# Altium PCB 2LED-ALUMBoard.PcbDoc
Units mil, origin at the board's own origin, x right, y up, seen from the top; angles counter-clockwise.
Board outline 1381.89 x 1960.63 mil, 2 copper layers (Top Layer, Bottom Layer); 6 components, 20 nets, 37 pads, 0 vias.
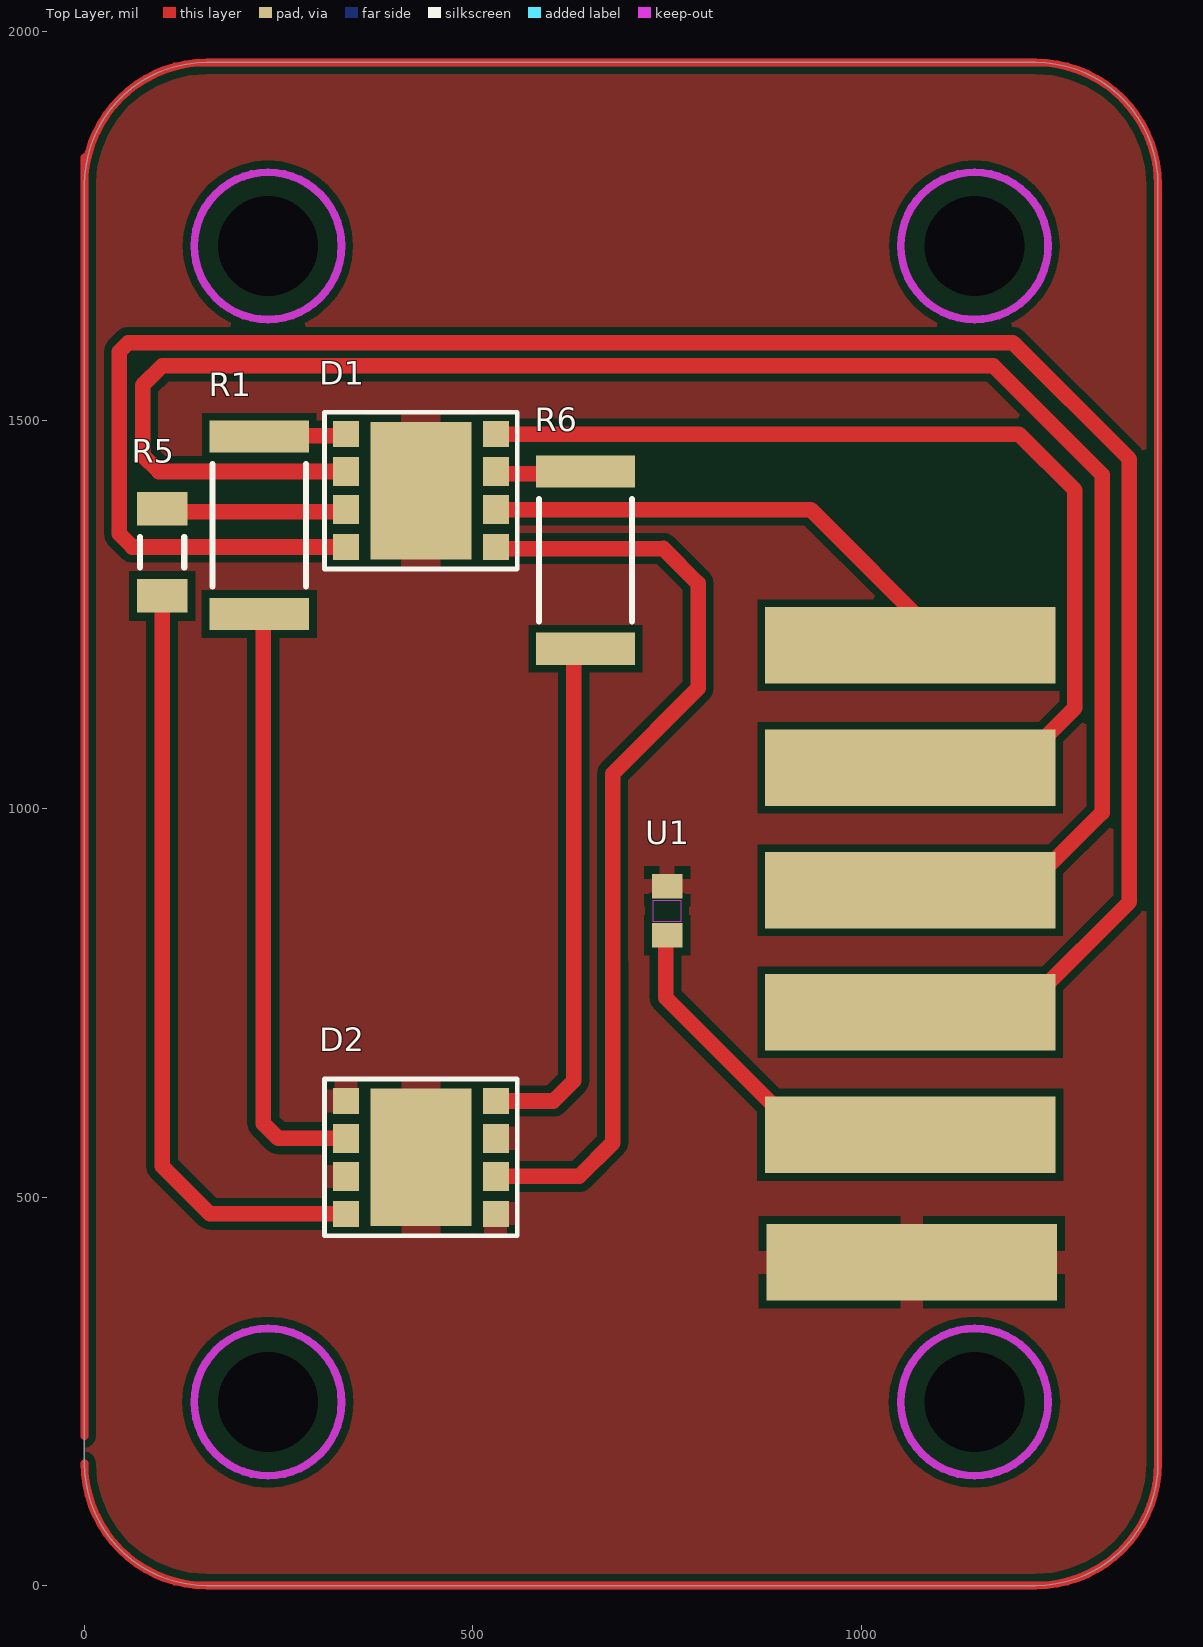
[diagram p0: Top Layer view]
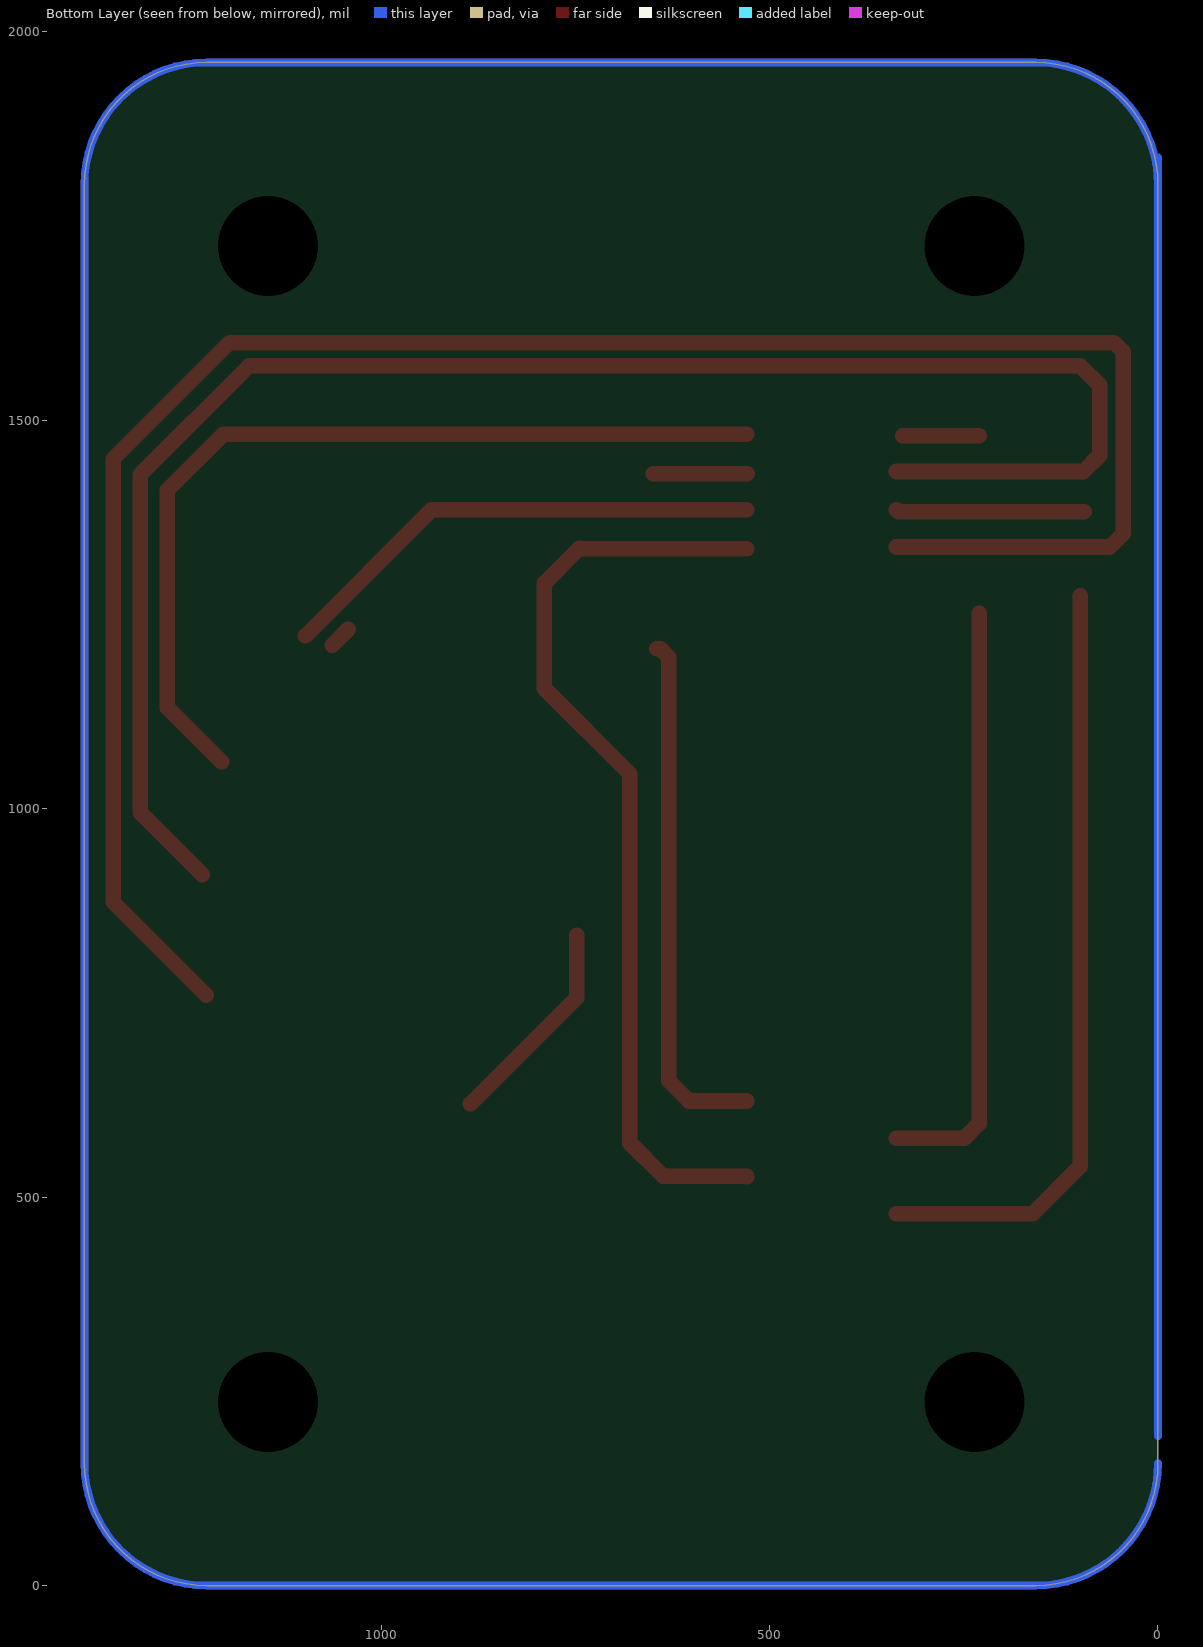
[diagram p1: Bottom Layer view, seen from below]
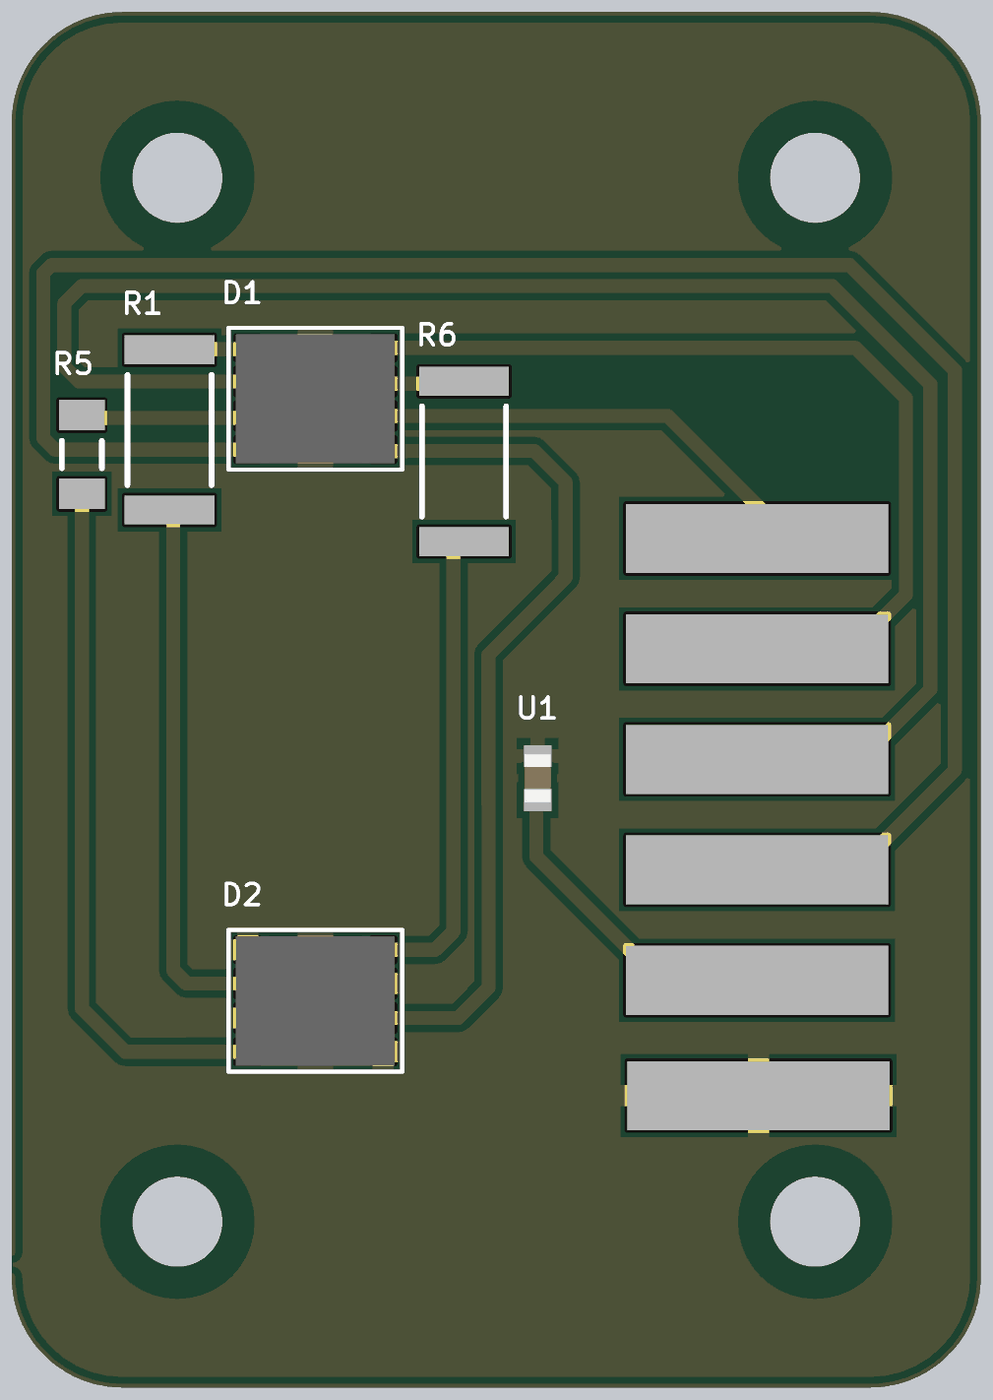
[diagram p2: 3D render of the assembled board from above, using the file's embedded part models]

## Layer stack, top to bottom
Top Solder: solder mask 0.4, Solder Resist, Dk 3.5
Top Layer: signal copper 1.4
Dielectric 1: dielectric 12.6, FR-4, Dk 4.8
Bottom Layer: signal copper 1.4
Bottom Solder: solder mask 0.4, Solder Resist, Dk 3.5

## Board outline
0,157.48 0,1803.15 cw(c157.48,1803.15) 157.48,1960.63 1224.41,1960.63 cw(c1224.41,1803.15) 1381.89,1803.15 1381.89,157.48 cw(c1224.41,157.48) 1224.41,0 157.48,0 cw(c157.48,157.48)

## Design rules (kind name [scope] priority, off if disabled: settings)
Clearance [All] p1: gap=10 ignorepadtopadclearanceinfootprint=FALSE
PolygonConnect [All] p1: connectstyle=Relief reliefconductorwidth=10 reliefentries=4 polygonreliefangle="90 Angle" airgapwidth=10
RoomDefinition LED_aluminum [InComponentClass('LED_aluminum')] p1: confinementstyle=ConfineIn formatcopy=TRUE lockcomponents=FALSE outline 1500,0 3315,0 3315,360 1500,360
RoutingVias [All] p1: holewidth=28 width=50 viastyle="Through Hole" minholewidth=28 minwidth=50 maxholewidth=28 maxwidth=50
SolderMaskExpansion [All] p1: expansion=4 istentingtop=FALSE
SupplyNets "Schematic Supply Nets" [InNet('GND')] p1: voltage=0.000
Width [All] p1: maxlimit=10 minlimit=10 preferedwidth=10
30 further rules are at their usual default settings.

## Components (designator, comment, footprint, x,y, rotation, side; value= is the part's Value field where it differs from the comment)
D1 "LE_RTDUW_S2WM" LE_RTDUW_S2WM 433.07,1409.45 r270 top
D2 "LE_RTDUW_S2WM" LE_RTDUW_S2WM 433.07,551.18 r270 top
R1 "Jumper 2512(6432)" RESC2512(6432)_L#1 225,1365 r90 top value="0.00 Ohm"
R5 "ERJ-8GEY0R00V" RESC3216X70X50NL05T20 100,1330 r90 top
R6 "Jumper 2512(6432)" RESC2512(6432)_L#2 645,1320 r270 top value="0.00 Ohm"
U1 "NTCS0603E3223FMT" NTCS0603_VIS 750,868.5 r90 top

## Footprints (in the part's own frame and the unit in brackets; to place one, negate y for a bottom-side part, rotate by r counter-clockwise, add the part's x,y. Pads: shape width x height; smd on the part's side, far side on the other; paste and mask are expansions set on the pad)
LE_RTDUW_S2WM [mil]
  rect 33.5x33.5 smd: 1(72.6,96.5) 4(-72.6,96.5) 5(-72.6,-96.5) 8(72.6,-96.5)
  rect 37.4x33.5 smd: 2(24.6,96.5) 3(-24.6,96.5) 6(-24.6,-96.5) 7(24.6,-96.5)
  rect 177.17x129.92 smd: 9(0,0)
  silkscreen extent -101,-124 101,124, body extent -92,-113 92,113, height 52
NTCS0603_VIS [mm]
  rect 0.8x1 smd paste+0 mask+0: 1(-0.8,0) 2(0.8,0)
  Top Layer keep-out region: -0.349,-0.449 -0.349,0.449 0.349,0.449 0.349,-0.449
  body extent -0.88,-0.47 0.88,0.47, height 0.94
RESC2512(6432)_L#1 [mm] "Chip Resistor, Body 6.4x3.2mm, IPC High Density"
  rect 1.05x3.25 smd: 2(-2.9,0) 2(2.9,0)
  silkscreen extent -2,-1.52 2,1.53, body extent -3.25,-1.7 3.25,1.7, height 0.75
RESC2512(6432)_L#2 [mm] "Chip Resistor, Body 6.4x3.2mm, IPC High Density"
  rect 1.05x3.25 smd: 1(-2.9,0) 2(2.9,0)
  silkscreen extent -2,-1.52 2,1.53, body extent -3.25,-1.7 3.25,1.7, height 0.75
RESC3216X70X50NL05T20 [mm] "Chip Resistor, 2-Leads, Body 3.20x1.60mm, IPC Medium Density"
  rect 1.1x1.65 smd: 1(-1.425,0) 2(1.425,0)
  silkscreen extent -0.5,-0.72 0.5,0.72, body extent -1.63,-0.82 1.62,0.82, height 0.7

## Part data
D1 D2: "LED OSTAR RGBW 625/527/453NM SMD", Supplier Part Number 1=720-LERTDUWS2WMA2120, Supplier 1=Mouser
R1 R6: library part CMP-1018-00001-1, "Jumper 2512 (6432 Metric)", Case-EIA=2512, Case-Metric=6432, Power=None, Technology=SMT, Tolerance=None
R5: library part CMP-2003-00541-1, Manufacturer=Panasonic, Part Number=ERJ-8GEY0R00V
U1: library part CMP-00030-42631939-1, "NTCS0603E3223FMT Thermistor NTC 22K Ohm 1% 2-Pin 0603 Surface Mount Solder Pad 3730K -4.5 to -4 T/R Automotive", Case Code (Imperial)=0603, Case Code (Metric)=1608, Max Operating Temperature=150°C, Min Operating Temperature=-40°C, Power Dissipation=125mW, Resistance=22kΩ, Tolerance=1%, Accuracy=1%, Case/Package=0603, Contact Plating=Tin, Depth=800µm, Height=800µm, Length=1.6mm, Mount="Surface Mount", NexarPartId=42631939, Number of Pins=2, Power Rating=125mW, Radiation Hardening=No, REACH SVHC=Unknown, RoHS=Compliant, Schedule B="8533400080, 8533400080", Termination=SMD/SMT, Width=1.6mm

## Free pads (board coordinates)
  rect 374.02x98.43 smd: 2(1062.99,580.35) 2(1062.99,737.83) 2(1062.99,895.32) 2(1062.99,1052.8) 2(1062.99,1210.28) 2(1064.91,416.02)
  rrect50% 0x0 hole 128.5 unplated mask+4: 7(236.22,236.22) 7(236.22,1724.41) 7(1145.67,236.22) 7(1145.67,1724.41)
  rrect50% 0x0 all layers, no hole: 8(1245,895)

## Nets (pads, with @x,y where several pads share a name; then routed paths per layer and width w, separated by ;. In a path a pad name is that pad's centre, name@x,y a point inside that pad or via, vN(x,y) a via of type N, cw(c..) or ccw(c..) an arc to the next point about the centre after c; other vN are vias at no path point)
"Blue Anode": D1.6 pad.2@1062.99,895.32 | length 2211.5
  Top Layer w20: D1.6 95.95,1434.05 75,1455 75,1545 100,1570 1170,1570 1310,1430 1310,995 pad.2@1230.15,915.15
"Blue D1D2": D2.6 R1.2@225,1250.83 | length 771.2
  Top Layer w20: R1.2@230,1251.65 230.29,1251.37 230.29,594.72 249.26,575.74 D2.6
"Blue D2D3": 
GND: D1.9 D2.1 D2.3 D2.5 D2.7 D2.9 pad.2@1064.91,416.02 U1.2
"Green Anode": D1.4 pad.2@1062.99,1052.8 | length 1154.1
  Top Layer w20: D1.4 1202.95,1482.05 1275,1410 1275,1130 pad.2@1205.15,1060.15
"Green D1D2": D2.4 R6.2 | length 675.9
  Top Layer w20: D2.4 603.78,623.78 630,650 630,1195.16 640.67,1205.83 R6.2
"Green D2D3": 
NetD1_1: D1.5 R1.2@225,1479.17 | length 98.7
  Top Layer w20: R1.2@230.12,1479.88 D1.5@328.79,1479.88
NetD1_3: D1.3 R6.1 | length 121.5
  Top Layer w20: D1.3@528.43,1430.95 529.51,1430.93 R6.1@649.88,1430.94
NetD1_7: D1.7 R5.2 | length 242.7
  Top Layer w20: R5.2@95,1382.2 333.93,1382.2 D1.7
NetD2_1: 
NetD2_3: 
NetD2_7: 
"Red Anode": D1.2 pad.2@1062.99,1210.28 | length 664.6
  Top Layer w20: D1.2 935.12,1384.85 pad.2@1097.49,1222.49 ; pad.2@1042.2,1231.07 pad.2@1062.99,1210.28
"Red D1D2": D1.1 D2.2 | length 1213
  Top Layer w20: D2.2 636.63,526.63 680.01,570.04 679.8,1044.76 789.97,1155.02 789.91,1290.09 745.02,1334.94 D1.1@529.57,1334.85
"Red D2D3": 
Temp: pad.2@1062.99,580.35 U1.1 | length 273.7
  Top Layer w20: U1.1@748.03,837.01 748.03,756.97 pad.2@885,620
"White Anode": D1.8 pad.2@1062.99,737.83 | length 2639.6
  Top Layer w20: D1.8 61.85,1336.85 45,1353.7 45,1588.28 56.72,1600 1195,1600 1345,1450 1345,880 pad.2@1225.15,760.15
"White D1D2": D2.8 R5.1 | length 995.9
  Top Layer w20: R5.1 100,540.01 161.5,478.5 D2.8
"White D2D3": 

## Polygon pours and split planes (outlines as drawn)
GND on Top Layer "GND_L01_P000" (solid, remove dead copper, pour order 0): 0,0 1400,0 1395,5 1395,2065 0,2065

## Keep-outs
Top Layer:
  circle w10: c1145.67,236.22 r94.81
  circle w10: c236.22,236.22 r94.81
  circle w10: c1145.67,1724.41 r94.81
  circle w10: c236.22,1724.41 r94.81

## Other copper
Multi-Layer:
  lines w10: 0,157.48 ccw(c157.48,157.48) 157.48,0 1224.41,0 ccw(c1224.41,157.48) 1381.89,157.48 1381.89,1803.15 ccw(c1224.41,1803.15) 1224.41,1960.63 157.48,1960.63 ccw(c157.48,1803.15) 0,1803.15 ; 0,192.48 0,1838.15

## Silkscreen, mask and mechanical layers (free items; w line width, h text height)
Top Solder:
  lines w11.81: 236.22,222.44 236.22,250 ; 236.22,1710.63 236.22,1738.19 ; 1145.67,222.44 1145.67,250 ; 1145.67,1710.63 1145.67,1738.19
Bottom Solder:
  region: 230.31,219.49 230.31,252.95 cw(c233.27,252.95) 233.27,255.91 239.17,255.91 cw(c239.17,252.95) 242.13,252.95 242.13,219.49 cw(c239.17,219.49) 239.17,216.54 233.27,216.54 cw(c233.27,219.49)
  region: 1139.76,219.49 1139.76,252.95 cw(c1142.72,252.95) 1142.72,255.91 1148.62,255.91 cw(c1148.62,252.95) 1151.57,252.95 1151.57,219.49 cw(c1148.62,219.49) 1148.62,216.54 1142.72,216.54 cw(c1142.72,219.49)
  region: 230.31,1707.68 230.31,1741.14 cw(c233.27,1741.14) 233.27,1744.09 239.17,1744.09 cw(c239.17,1741.14) 242.13,1741.14 242.13,1707.68 cw(c239.17,1707.68) 239.17,1704.72 233.27,1704.72 cw(c233.27,1707.68)
  region: 1139.76,1707.68 1139.76,1741.14 cw(c1142.72,1741.14) 1142.72,1744.09 1148.62,1744.09 cw(c1148.62,1741.14) 1151.57,1741.14 1151.57,1707.68 cw(c1148.62,1707.68) 1148.62,1704.72 1142.72,1704.72 cw(c1142.72,1707.68)